# Altium PCB ESPGateway.PcbDoc
Units mil, origin at the board's own origin, x right, y up, seen from the top; angles counter-clockwise.
Board outline 1257 x 1300 mil, 2 copper layers (Top Layer, Bottom Layer); 37 components, 34 nets, 156 pads, 117 vias.
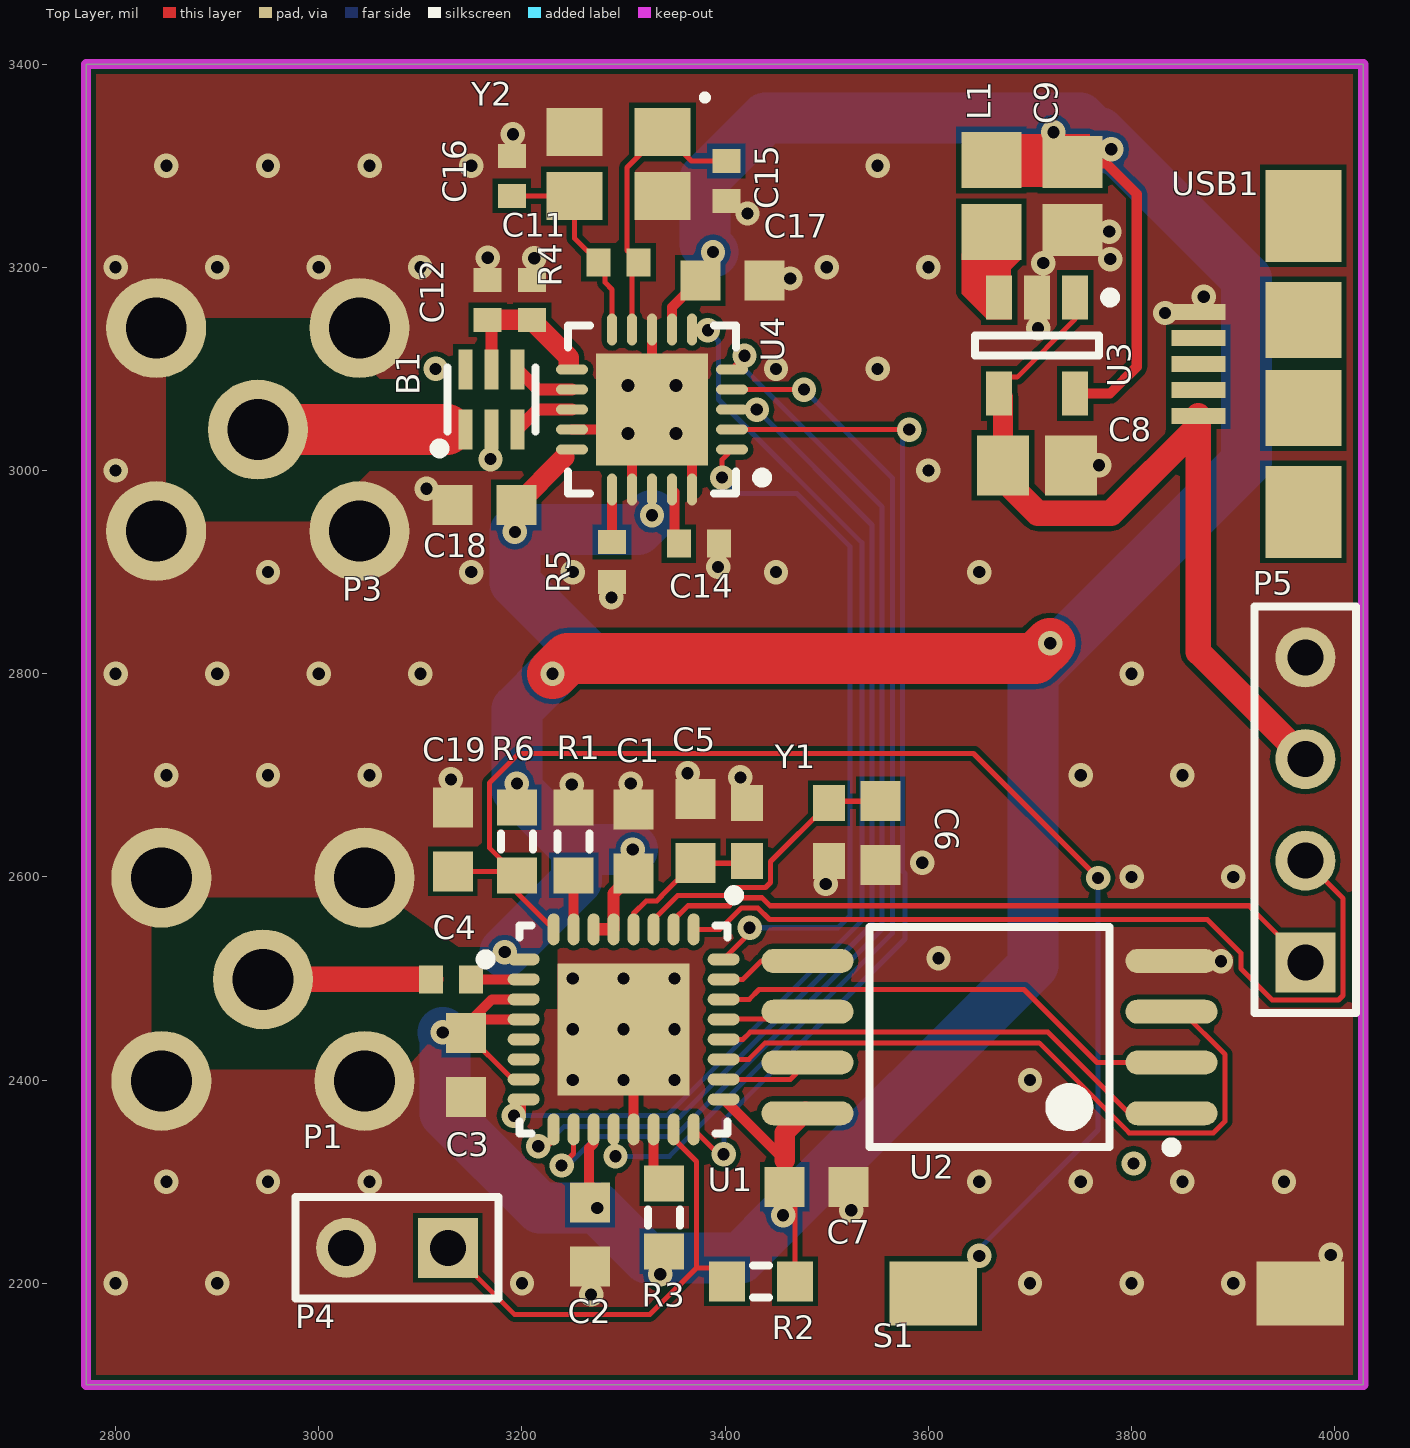
[diagram p0: Top Layer view]
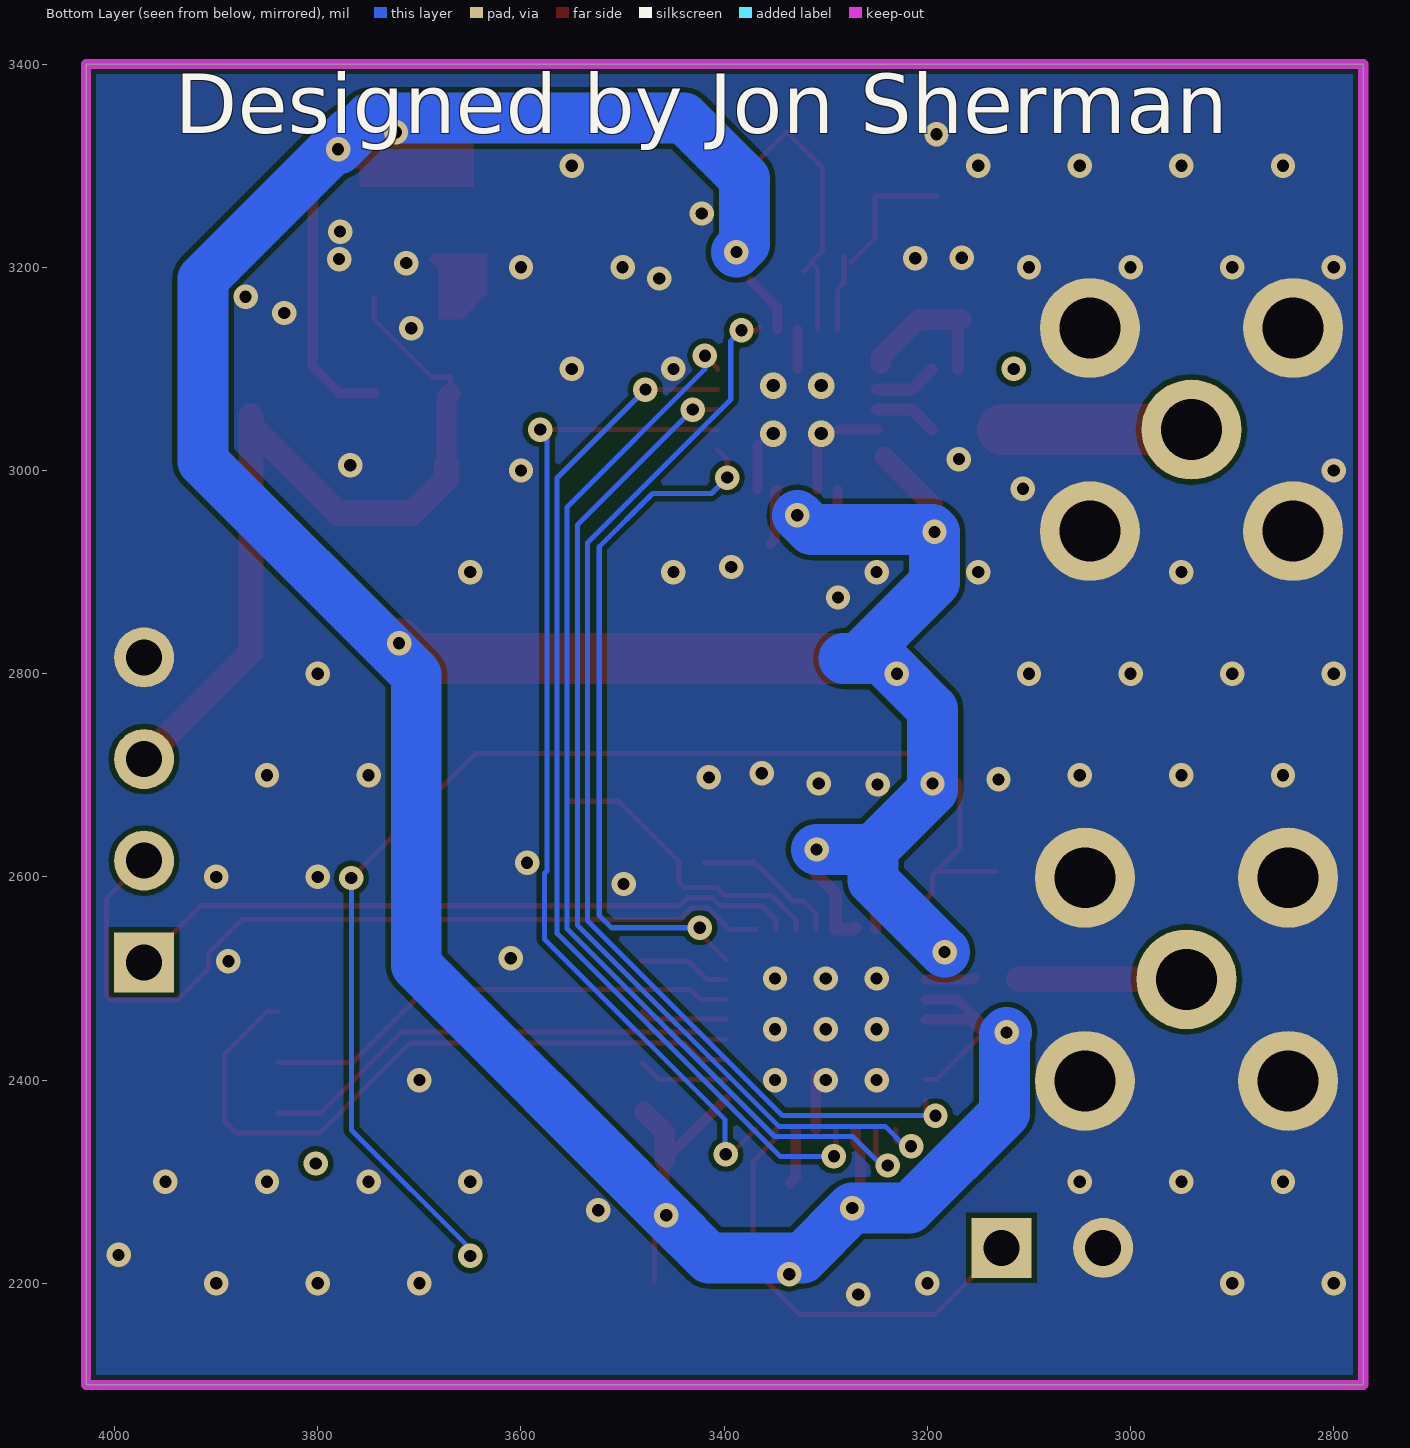
[diagram p1: Bottom Layer view, seen from below]
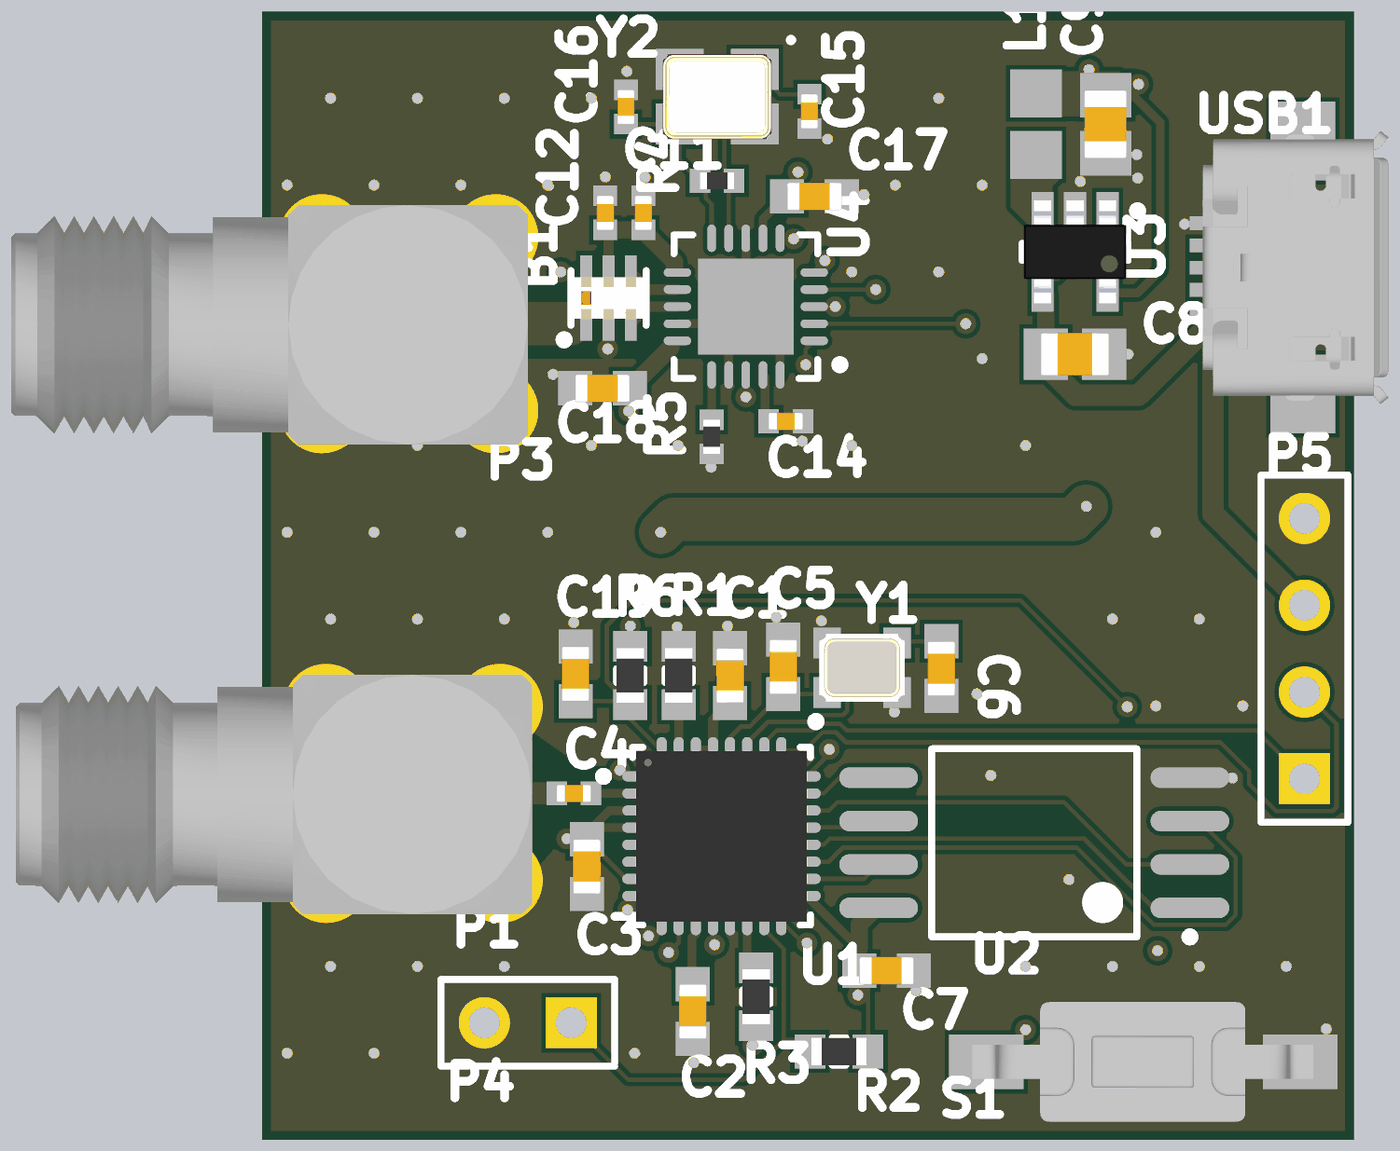
[diagram p2: 3D render of the assembled board from above, using the file's embedded part models]

## Layer stack, top to bottom
Top Solder: solder mask 0.4, Solder Resist, Dk 3.5
Top Layer: signal copper 1.4
Dielectric 1: dielectric 12.6, FR-4, Dk 4.8
Bottom Layer: signal copper 1.4
Bottom Solder: solder mask 0.4, Solder Resist, Dk 3.5

## Board outline
2771,2100 2771,3400 4028,3400 4028,2100

## Design rules (kind name [scope] priority, off if disabled: settings)
Clearance [All] p1: gap=5 ignorepadtopadclearanceinfootprint=FALSE
ComponentClearance [All] p1: gap=0 collisioncheckmode=3 verticalgap=0 showdistances=FALSE
MinimumSolderMaskSliver [All] p1: minsoldermaskwidth=0
PolygonConnect [All] p1: connectstyle=Direct reliefconductorwidth=10 reliefentries=4 polygonreliefangle="90 Angle" airgapwidth=10
RoutingVias [All] p1: holewidth=11.81 width=21.81 viastyle="Through Hole" minholewidth=11.81 minwidth=21.81 maxholewidth=248.03 maxwidth=50
SilkToSilkClearance [All] p1: silktosilkclearance=0
SilkToSolderMaskClearance [IsPad] p1: minsilkscreentomaskgap=0 clearancetoexposedcopper=TRUE
SolderMaskExpansion [All] p1: expansion=0
Width [All] p1: maxlimit=200 minlimit=5 preferedwidth=5
26 further rules are at their usual default settings.

## Components (designator, comment, footprint, x,y, rotation, side; value= is the part's Value field where it differs from the comment)
B1 "2450BM14A0002T" 2450BM15A0002E 3170,3070 r90 top
C1 "1uF" CAPC1608N 3309.84,2635 r270 top
C2 "0.1uF" CAPC1608N 3267,2248 r90 top
C3 "10uF" CAPC1608N 3145,2415 r90 top
C4 "5p6" CAPC1005N 3130,2499.21 r0 top
C5 "12pF" CAPC1608N 3371,2645 r270 top
C6 "12pF" CAPC1608N 3553,2643 r90 top
C7 "100nF" CAPC1608N 3490,2295 r180 top
C8 "10uF" CAPC2012N 3706.84,3005.13 r180 top
C9 "10uF" CAPC2012N 3742,3270.13 r90 top
C11 "4.7pF" CAPC1005N 3210,3168 r270 top
C12 "2.2nF" CAPC1005N 3166.16,3168 r270 top
C14 "33nF" CAPC1005N 3374,2928 r180 top
C15 "22pF" CAPC1005N 3401.12,3285 r90 top
C16 "22pF" CAPC1005N 3190,3290 r270 top
C17 "10nF" CAPC1608N 3407,3187 r180 top
C18 "1nF" CAPC1608N 3163,2966 r0 top
C19 "0.1uF" CAPC1608N 3132,2637 r270 top
L1 "Inductor" INDC2012N 3662,3270.13 r90 top value=4.7uH
P1 "SMB" SMA-J-P-X-RA-TH1 3095,2499.21 r90 top
P3 "SMB" SMA-J-P-X-RA-TH1 3090,3040.32 r90 top
P4 "Header 2" HDR1X2 3127,2235 r180 top
P5 "Header 4" HDR1X4 3971,2516 r90 top
R1 "12k" RESC1608N 3250.79,2635 r270 top
R2 "12k" RESC1608N 3435.26,2202 r180 top
R3 "12k" RESC1608N 3340,2265 r90 top
R4 "1M" RESC1005N 3295,3205 r0 top
R5 "22k" RESC1005N 3288.63,2910 r90 top
R6 "12k" RESC1608N 3195,2635 r270 top
S1 "SW-PB" FSMSM 3966,2190 r180 top
U1 "ESP8266EX" QFN50P500X500-32V2N 3300,2450 r0 top
U2 "Flash_SPI" SOIC127P1030-8N 3660,2442.4 r180 top
U3 "PAM2301CAAB330" SOT23-5AN 3707,3123.08 r270 top
U4 "nRF24L01P-R7" QFN50P400X400-20VN 3328,3060 r180 top
USB1 "USB Micro B Receptacle" 10104110-0001LF 3839.13,3105 r90 top
Y1 "26M" XTAL2520-4 3449,2644 r0 top
Y2 "16M" XTAL3225-4-N 3295,3302.13 r180 top

## Footprints (in the part's own frame and the unit in brackets; to place one, negate y for a bottom-side part, rotate by r counter-clockwise, add the part's x,y. Pads: shape width x height; smd on the part's side, far side on the other; paste and mask are expansions set on the pad)
2450BM15A0002E [mm] "2.45 GHz Impedance Matched Balun-BPF: For TI CC253X, CC254X, CC257X,  CC853X and CC852X Chipset family"
  rect 1x0.35 smd: 1(-0.75,0.65) 2(-0.75,0) 3(-0.75,-0.65) 4(0.75,-0.65) 5(0.75,0) 6(0.75,0.65)
  silkscreen extent -1.35,-1.1 0.8,1.42, body extent -0.62,-1 0.62,1, height 0.8
10104110-0001LF [mm]
  rect 2.3x1.9 smd: 0(-3.7,-3.3) 0(3.7,-3.3)
  rect 1.9x1.9 smd: 0(-1.1,-3.3) 0(1.1,-3.3)
  rect 0.4x1.35 smd: 1(-1.3,-0.675) 2(-0.65,-0.675) 3(0,-0.675) 4(0.65,-0.675) 5(1.3,-0.675)
  body extent -3.99,-5.8 3.99,-0.38, height 2.63
CAPC1005N [mm] "Chip Capacitor (0402), Body 1.0x0.5mm, IPC Medium Density"
  rect 0.6x0.7 smd: 1(-0.5,0) 2(0.5,0)
  body extent -0.51,-0.26 0.51,0.26, height 0.61
CAPC1608N [mm] "Chip Capacitor (0603), Body 1.6x0.8mm, IPC Medium Density"
  rect 1x1 smd: 1(-0.8,0) 2(0.8,0)
  body extent -0.8,-0.41 0.8,0.41, height 0.91
CAPC2012N [mm] "Chip Capacitor (0805), Body 2.0x1.3mm, IPC Medium Density"
  rect 1.3x1.5 smd: 1(-0.85,0) 2(0.85,0)
  body extent -1,-0.63 1,0.63, height 0.85
FSMSM [mm]
  rect 2.18x1.6 smd mask+0: 1(0,0) 2(9.175,0)
  body extent -0.38,-1.75 9.58,1.75, height 4.4
HDR1X2 [mm] "Connector; Header; 2 Position"
  rect 1.5x1.5 hole 0.9: 1(0,0)
  round 1.5 hole 0.9: 2(2.54,0)
  silkscreen extent -1.27,-1.27 3.81,1.27
HDR1X4 [mm] "Connector; Header; 4 Position"
  rect 1.5x1.5 hole 0.9: 1(0,0)
  round 1.5 hole 0.9: 2(2.54,0) 3(5.08,0) 4(7.62,0)
  silkscreen extent -1.27,-1.27 8.89,1.27
INDC2012N [mm] "Chip Inductor, Body 2.0x1.2mm, IPC Medium Density"
  rect 1.4x1.5 smd: 1(-0.9,0) 2(0.9,0)
  body extent -1.1,-0.7 1.1,0.7, height 1.1
QFN50P400X400-20VN [mm] "QFN, 20-Leads, Body 4x4mm, Pitch 0.5mm, IPC Medium Density"
  oval 0.8x0.25 smd: 1(-2,1) 2(-2,0.5) 3(-2,0) 4(-2,-0.5) 5(-2,-1) 11(2,-1) 12(2,-0.5) 13(2,0) 14(2,0.5) 15(2,1)
  oval 0.25x0.8 smd: 6(-1,-2) 7(-0.5,-2) 8(0,-2) 9(0.5,-2) 10(1,-2) 16(1,2) 17(0.5,2) 18(0,2) 19(-0.5,2) 20(-1,2)
  rect 2.8x2.8 smd: 21(0,0)
  silkscreen extent -2.88,-2.1 2.1,2.1, body extent -2.07,-2.07 2.07,2.07, height 1
QFN50P500X500-32V2N [mm] "QFN, 32-Leads, Body 5x5mm, 3.3x3.3mm Thermal Pad, Pitch 0.5mm, IPC Medium Density"
  oval 0.8x0.3 smd: 1(-2.5,1.75) 2(-2.5,1.25) 3(-2.5,0.75) 4(-2.5,0.25) 5(-2.5,-0.25) 6(-2.5,-0.75) 7(-2.5,-1.25) 8(-2.5,-1.75) 17(2.5,-1.75) 18(2.5,-1.25) 19(2.5,-0.75) 20(2.5,-0.25) 21(2.5,0.25) 22(2.5,0.75) 23(2.5,1.25) 24(2.5,1.75)
  oval 0.3x0.8 smd: 9(-1.75,-2.5) 10(-1.25,-2.5) 11(-0.75,-2.5) 12(-0.25,-2.5) 13(0.25,-2.5) 14(0.75,-2.5) 15(1.25,-2.5) 16(1.75,-2.5) 25(1.75,2.5) 26(1.25,2.5) 27(0.75,2.5) 28(0.25,2.5) 29(-0.25,2.5) 30(-0.75,2.5) 31(-1.25,2.5) 32(-1.75,2.5)
  rect 3.3x3.3 smd: 33(0,0)
  silkscreen extent -3.57,-2.6 2.6,2.6, body extent -2.51,-2.51 2.51,2.51, height 0.8
RESC1005N [mm] "Chip Resistor, Body 1.1x0.5mm, IPC Medium Density"
  rect 0.6x0.7 smd: 1(-0.5,0) 2(0.5,0)
  body extent -0.5,-0.25 0.5,0.25, height 0.35
RESC1608N [mm] "Chip Resistor, Body 1.6x0.8mm, IPC Medium Density"
  rect 0.9x1 smd: 1(-0.85,0) 2(0.85,0)
  silkscreen extent -0.2,-0.4 0.2,0.4, body extent -0.8,-0.4 0.8,0.4, height 0.55
SMA-J-P-X-RA-TH1 [mm] "SMA right angle"
  round 2.5 hole 1.524: 1(0,3.81) 2(-2.54,6.35) 2(-2.54,1.27) 2(2.54,6.35) 2(2.54,1.27)
  body extent -3.53,0.33 3.47,15.43, height 9.63
SOIC127P1030-8N [mm] "SOIC, 8-Leads, Body 5.3x7.5mm, Pitch 1.27mm, IPC Medium Density"
  oval 2.3x0.6 smd: 1(-4.55,1.905) 2(-4.55,0.635) 3(-4.55,-0.635) 4(-4.55,-1.905) 5(4.55,-1.905) 6(4.55,-0.635) 7(4.55,0.635) 8(4.55,1.905)
  silkscreen extent -4.67,-2.75 3,2.88, body extent -3.75,-2.73 3.75,2.73, height 2.65
SOT23-5AN [mm] "SOT23, 5-Leads, Body 2.9x1.6mm, Pitch 0.95mm, Lead Span 2.8mm, IPC Medium Density"
  rect 1.1x0.65 smd: 1(-1.2,0.95) 2(-1.2,0) 3(-1.2,-0.95) 4(1.2,-0.95) 5(1.2,0.95)
  silkscreen extent -1.32,-1.55 0.25,1.95, body extent -1.5,-1.5 1.5,1.5, height 1.3
XTAL2520-4 [mm]
  rect 0.8x0.9 smd: 1(-0.7,-0.725) 2(1.35,-0.725) 3(1.35,0.725) 4(-0.7,0.725)
  silkscreen extent -1.15,-1.7 -0.9,-1.45, body extent -0.92,-1 1.58,1, height 0.8
XTAL3225-4-N [mm]
  rect 1.4x1.2 smd: 1(-1.101,-0.791) 2(1.099,-0.791) 3(1.099,0.809) 4(-1.101,0.809)
  silkscreen extent -2.21,-1.7 -2.11,-1.6, body extent -1.61,-1.25 1.61,1.27, height 0.6

## Part data
B1: "JOHANSON TECHNOLOGY         2450BM14A0002T             Baluns Transformer, SMD, 2.4 GHz, 2.5 GHz, 2 dB, 0603", Case/Package=0603, Case Code (Metric)=1608, Frequency=2.45GHz, Manufacturer=Johanson, Max Frequency=2.5GHz, Max Operating Temperature=85°C, Min Operating Temperature=-40°C, Package Quantity=4000, Supplier Part Number 1=712-1574-1-ND, Case Code (Imperial)=0603, ComponentLink1Description=http://www.farnell.com/datasheets/1643106.pdf, ComponentLink1URL=http://www.farnell.com/datasheets/1643106.pdf, ComponentLink2Description=https://www.johansontechnology.com/datasheets/baluns/Balun_Filter_Matched_2450BM14A0002_v2.pdf, ComponentLink2URL=https://www.johansontechnology.com/datasheets/baluns/Balun_Filter_Matched_2450BM14A0002_v2.pdf, ComponentLink3Description=http://www.mouser.com/ds/2/611/2450BM14A0002T-247800.pdf, ComponentLink3URL=http://www.mouser.com/ds/2/611/2450BM14A0002T-247800.pdf, Contact Plating=Matte,Tin, Impedance=50R, Insertion Loss=2dB, Manufacturer Part Number=2450BM14A0002T, Mount="Surface Mount", Number of Pins=6, Packaging="Tape and Reel", Pricing 1="1=0.94, 10=0.83, 25=0.7496, 100=0.656, 250=0.57568, 500=0.50872, 1000=0.40163 (USD)", REACH SVHC=Unknown, Return Loss=9.5dB, Stock 1=209106, Supplier 1=Digi-Key, Termination=SMD/SMT
C1: library part "Cap Semi", "Capacitor (Semiconductor SIM Model)", Supplier Part Number 1=1276-6524-1-ND, LatestRevisionDate=29-May-2009, LatestRevisionNote="IPC-7351 Footprint Added.", PackageDescription="Chip Capacitor", PackageReference=C1206, Published=8-Jun-2000, Publisher="Altium Limited", Supplier 1=Digi-Key
C2 C3 C14: library part "Cap Semi", "Capacitor (Semiconductor SIM Model)", LatestRevisionDate=29-May-2009, LatestRevisionNote="IPC-7351 Footprint Added.", PackageDescription="Chip Capacitor", PackageReference=C1206, Published=8-Jun-2000, Publisher="Altium Limited"
  C2: Supplier 1=Digi-Key, Supplier 2=Digi-Key, Supplier Part Number 2=1276-1012-1-ND
  C14: Supplier 1=Digi-Key, Supplier 2=Digi-Key, Supplier Part Number 2=1276-1177-1-ND
C4: library part "Cap Semi", "Capacitor (Semiconductor SIM Model)", Supplier Part Number 1=490-6250-1-ND, LatestRevisionDate=29-May-2009, LatestRevisionNote="IPC-7351 Footprint Added.", PackageDescription="Chip Capacitor", PackageReference=C1206, Published=8-Jun-2000, Publisher="Altium Limited", Supplier 1=Digi-Key
C5 C6 C19: library part "Cap Semi", "Capacitor (Semiconductor SIM Model)", Supplier Part Number 1=1276-1254-1-ND, LatestRevisionDate=29-May-2009, LatestRevisionNote="IPC-7351 Footprint Added.", PackageDescription="Chip Capacitor", PackageReference=C1206, Published=8-Jun-2000, Publisher="Altium Limited", Supplier 1=Digi-Key
C7: library part "Cap Semi", "Capacitor (Semiconductor SIM Model)", Supplier Part Number 1=1276-1012-1-ND, LatestRevisionDate=29-May-2009, LatestRevisionNote="IPC-7351 Footprint Added.", PackageDescription="Chip Capacitor", PackageReference=C1206, Published=8-Jun-2000, Publisher="Altium Limited", Supplier 1=Digi-Key
C8 C9: library part "Cap Semi", "Capacitor (Semiconductor SIM Model)", Supplier Part Number 1=1276-6456-1-ND, LatestRevisionDate=29-May-2009, LatestRevisionNote="IPC-7351 Footprint Added.", PackageDescription="Chip Capacitor", PackageReference=C1206, Published=8-Jun-2000, Publisher="Altium Limited", Supplier 1=Digi-Key
C11: library part "Cap Semi", "Capacitor (Semiconductor SIM Model)", Supplier Part Number 1=311-1367-1-ND, LatestRevisionDate=29-May-2009, LatestRevisionNote="IPC-7351 Footprint Added.", PackageDescription="Chip Capacitor", PackageReference=C1206, Published=8-Jun-2000, Publisher="Altium Limited", Supplier 1=Digi-Key
C12: library part "Cap Semi", "Capacitor (Semiconductor SIM Model)", Supplier Part Number 1=490-4914-1-ND, LatestRevisionDate=29-May-2009, LatestRevisionNote="IPC-7351 Footprint Added.", PackageDescription="Chip Capacitor", PackageReference=C1206, Published=8-Jun-2000, Publisher="Altium Limited", Supplier 1=Digi-Key
C15 C16: library part "Cap Semi", "Capacitor (Semiconductor SIM Model)", Supplier Part Number 1=399-7775-1-ND, LatestRevisionDate=29-May-2009, LatestRevisionNote="IPC-7351 Footprint Added.", PackageDescription="Chip Capacitor", PackageReference=C1206, Published=8-Jun-2000, Publisher="Altium Limited", Supplier 1=Digi-Key
C17: library part "Cap Semi", "Capacitor (Semiconductor SIM Model)", Supplier Part Number 1=1276-1921-1-ND, LatestRevisionDate=29-May-2009, LatestRevisionNote="IPC-7351 Footprint Added.", PackageDescription="Chip Capacitor", PackageReference=C1206, Published=8-Jun-2000, Publisher="Altium Limited", Supplier 1=Digi-Key
C18: library part "Cap Semi", "Capacitor (Semiconductor SIM Model)", Supplier Part Number 1=311-1080-1-ND, LatestRevisionDate=29-May-2009, LatestRevisionNote="IPC-7351 Footprint Added.", PackageDescription="Chip Capacitor", PackageReference=C1206, Published=8-Jun-2000, Publisher="Altium Limited", Supplier 1=Digi-Key
L1: Supplier Part Number 1=445-8659-1-ND, Code_IEC=1005, Code_JEITA=0402, LatestRevisionDate=29-May-2009, LatestRevisionNote="IPC-7351 Footprint Added.", PackageDescription="Chip Inductor", PackageReference=0402-A, Published=8-Jun-2000, Publisher="Altium Limited", Supplier 1=Digi-Key
P1 P3: "SMB Straight Connector", Supplier Part Number 1=931-1361-ND, LatestRevisionDate=17-Jul-2002, LatestRevisionNote="Re-released for DXP Platform.", Publisher="Altium Limited", Supplier 1=Digi-Key
P4: "Header, 2-Pin", LatestRevisionDate=17-Jul-2002, LatestRevisionNote="Re-released for DXP Platform.", Publisher="Altium Limited"
P5: "Header, 4-Pin", LatestRevisionDate=17-Jul-2002, LatestRevisionNote="Re-released for DXP Platform.", Publisher="Altium Limited"
R1 R2 R3 R4 R5 R6: library part "Res Semi", "Semiconductor Resistor", LatestRevisionDate=17-Jul-2002, LatestRevisionNote="Re-released for DXP Platform.", PackageDescription="Axial Device, Thru-Hole; 2 Leads; 0.5 in Pin Spacing", PackageReference=AXIAL-0.5, Published=8-Jun-2000, Publisher="Altium Limited", Supplier 1=Digi-Key, Supplier 2=Digi-Key
  R1 R2 R3: Supplier Part Number 2=RMCF0603FT12K0CT-ND
  R4: Supplier Part Number 2=A121559CT-ND
  R5: Supplier Part Number 2=541-22KGCT-ND
  R6: Supplier 3=Digi-Key, Supplier Part Number 3=RMCF0603FT12K0CT-ND
S1: "Switch", Supplier Part Number 1=450-1140-ND, LatestRevisionDate=17-Jul-2002, LatestRevisionNote="Re-released for DXP Platform.", PackageDescription="Switch; 2 Leads", PackageReference=SPST-2, Published=24-Mar-1999, Publisher="Altium Limited", Supplier 1=Digi-Key
U2: Supplier Part Number 1=W25Q16JVSSIQ-ND, Supplier 1=Digi-Key
U3: "IC REG BCK SYNC 3.3V 0.8A TSOT25", Case/Package=SOT-23-5, Manufacturer=Diodes, Max Input Voltage=5.5V, Max Operating Temperature=85°C, Max Output Current=800mA, Min Input Voltage=2.5V, Min Operating Temperature=-40°C, Min Output Voltage=3.3V, Package Quantity=3000, Supplier Part Number 1=PAM2301CAAB330DICT-ND, Switching Frequency=1.5MHz, Efficiency=96%, Manufacturer Part Number=PAM2301CAAB330, Mount="Surface Mount", Number of Outputs=1, Number of Pins=5, Operating Supply Voltage=5.5V, Output Configuration=Positive, Output Current=800mA, Output Type=Fixed, Output Voltage=3.3V, Packaging="Tape and Reel", Pricing 1="1=0.6, 10=0.51, 100=0.3807, 500=0.29912, 1000=0.23113 (USD)", Radiation Hardening=No, Stock 1=2099, Supplier 1=Digi-Key, Synchronous Rectifier=Yes
U4: "RF Transceiver SNGL-CHP ULTR-LW POW 2.4GHz TRNSCVR", Case/Package=QFN, Current - Receiving=13.5mA, Current - Transmitting=11.3mA, Frequency=2.4GHz, Manufacturer="Nordic Semiconductor", Max Operating Temperature=85°C, Max Supply Voltage=3.6V, Min Operating Temperature=-40°C, Package Quantity=1500, Supplier Part Number 1=1490-1033-1-ND, Data Rate=2Mbps, Depth=4mm, Interface=SPI, Length=4mm, Manufacturer Part Number=nRF24L01P-R7, Packaging="Tape and Reel", Pricing 1="1=3.53, 10=3.15, 25=2.8352, 100=2.583, 250=2.331, 500=2.0916 (USD)", Sensitivity=-94dBm, Stock 1=26627, Supplier 1=Digi-Key
USB1: Supplier Part Number 1=609-4052-1-ND, Supplier 1=Digi-Key
Y1: library part XTAL_4SMD, "Crystal Oscillator (4 pin)", Supplier Part Number 1=SER4105CT-ND, LatestRevisionDate=17-Jul-2002, LatestRevisionNote="Re-released for DXP Platform.", PackageDescription="Crystal, Thru-Hole; 2 Leads; Body 3.1 x 8.2 mm (Dia.xH)", PackageReference=R38, Published=8-Jun-2000, Publisher="Altium Limited", Supplier 1=Digi-Key
Y2: library part XTAL_4SMD, "Crystal Oscillator (4 pin)", Supplier Part Number 1=SER4069CT-ND, LatestRevisionDate=17-Jul-2002, LatestRevisionNote="Re-released for DXP Platform.", PackageDescription="Crystal, Thru-Hole; 2 Leads; Body 3.1 x 8.2 mm (Dia.xH)", PackageReference=R38, Published=8-Jun-2000, Publisher="Altium Limited", Supplier 1=Digi-Key

## Via types
v1: diameter 24, hole 12, Top Layer to Bottom Layer, tented both sides, 113 vias
v2: diameter 25.98, hole 12.99, Top Layer to Bottom Layer, tented top, 4 vias

## Nets (pads, with @x,y where several pads share a name; then routed paths per layer and width w, separated by ;. In a path a pad name is that pad's centre, name@x,y a point inside that pad or via, vN(x,y) a via of type N, cw(c..) or ccw(c..) an arc to the next point about the centre after c; other vN are vias at no path point)
3V3: C1.2 C2.2 C3.2 C7.2 C9.2 C17.2 C18.2 L1.2 R2.1 R3.1 R6.1 U1.1 U1.3 U1.4 U1.7 U1.11 U1.17 U1.29 U1.30 U2.8 U3.5 U4.7 U4.15 U4.18 | length 4687.6
  Top Layer w5: C3.2 3190.71,2400.79 U1.7 ; C3.2@3154.57,2456.06 3158.35,2459.84 3159.5,2461 3200.42,2461 U1.4 ; C7.2 3468.73,2284.78 R2.1
  Top Layer w10: C3.2 3154.57,2456.06 3147.06,2456.06 3170.53,2479.53 U1.3 ; C3.2@3158.35,2459.84 U1.4 ; C2.2@3270.47,2293 3266,2297.47 3266,2333.11 3270.47,2337.59 U1.11 ; U4.7 3347.68,3160.68 C17.2@3373,3186 ; U1.17 3458.5,2321.02 3459,2320.53 C7.2@3459,2295 ; C9.2@3737,3302.13 3775,3302.13 3805,3272.13 3805,3102.13 3778.7,3075.83 U3.5
  Top Layer w12: U1.30@3271,2550 3272.57,2548.43 U1.29 3290.16,2583.82 C1.2
  Top Layer w20: C18.2 3194.63,2966 3241.81,3013.18 ; 3458.5,2321.02 3458.5,2348.5 U2.8@3479,2369
  Top Layer w50: v1(3230,2800) 3245,2815 3705,2815 v1(3720,2830)
  Bottom Layer w50: v1(3122,2447) 3124.21,2444.79 3124.21,2367.39 3217.6,2274 v1(3274,2274) 3322.99,2225.01 3415.01,2225.01 v1(3457,2267) 3703,2513 3703,2799 3913,3009 3913,3188.4 3768.4,3333 ; v1(3183,2526) 3253.6,2596.6 3253.6,2627 ; 3282,2815 3268,2815 ; v1(3309,2627) 3253.6,2627 ; v1(3328,2956) 3314,2942 3195.44,2942 v1(3193,2939.56) 3193,2890 3268,2815 ; v1(3388,3215) 3380,3223 3380,3287.4 3439.6,3347 3749.13,3347 v1(3780,3316.13) ; 3253.6,2627 3195,2685.6 v1(3195,2692) 3195,2765 v1(3230,2800) 3250,2820 3255,2815 3268,2815
  other v1: 3336,2209 3723,3333
5V: C8.2 P5.3 U3.1 U3.4 USB1.1 | length 844.5
  Top Layer w5: U3.4 3669.6,3091.92 3687.36,3091.92 3744.4,3148.96 U3.1
  Top Layer w20: U3.4 3673.38,3072.05 C8.2
  Top Layer w25: C8.2 3673.38,2992.2 3707.47,2958.11 3780,2958.11 3865.71,3043.81 ; USB1.1 3865.71,3043.81 ; P5.3 3865.71,2821.29 3865.71,3043.81
ANT: C4.1 P1.1 | length 165.3
  Top Layer w25: P1.1 C4.1
ANT1: B1.4 U4.12 | length 61.9
  Top Layer w12: B1.4 3215.43,3079.68 U4.12
ANT2: B1.3 U4.13 | length 61.8
  Top Layer w12: B1.3 3215.12,3060 U4.13
CE: U1.24 U4.1 | length 694.5
  Top Layer w5: v1(3397,2993) 3397,3010.89 U4.1 ; U1.24 3424,2544.47 v1(3424,2550)
  Bottom Layer w5: v1(3397,2993) 3412.5,2977.5 3470.5,2977.5 3523,2925 3523,2562 3511,2550 v1(3424,2550)
CS: U1.16 U4.2 | length 1005.1
  Top Layer w5: U1.16 3393.47,2327 v1(3398.43,2327) ; U4.2 v1(3581.06,3040.32)
  Bottom Layer w5: v1(3398.43,2327) 3399,2327.57 3399,2361 3577,2539 3577,2603.42 3574.5,2605.92 3574.5,3033.75 v1(3581.06,3040.32)
EXT_RSTB: C19.2 R6.2 S1.2 U1.32 | length 1313.9
  Top Layer w5: C19.2 R6.2@3191.03,2605.5 ; U1.32 3195,2584.53 R6.2 R6.2@3191.03,2605.5 ; v1(3767,2599) 3644.5,2721.5 3196.92,2721.5 3167.81,2692.39 3167.81,2628.72 R6.2@3191.03,2605.5
  Bottom Layer w5: v1(3650,2227) 3650,2231 3649,2232 3648,2232 3767,2351 v1(3767,2599)
GND: B1.2 C1.1 C2.1 C3.1 C5.1 C6.1 C7.1 C8.1 C9.1 C11.1 C12.1 C14.1 C15.1 C16.1 C17.1 C18.1 C19.1 P1.2 P3.2 P4.2 P5.4 R1.1 R5.1 S1.1 U1.13 U1.33 U2.4 U3.2 U4.8 U4.14 U4.17 U4.20 U4.21 USB1.5 Y1.2 Y1.4 Y2.2 Y2.4 | length 215.5
  Top Layer w10: U4.14 U4.21@3287.32,3040.32 ; U4.17 U4.21@3308.32,3020.68 ; U1.13 3309.84,2404.84 U1.33@3311,2406 ; U4.21@3328,3100 U4.8 ; U4.20 U4.21@3367.37,3025.63
  other v1: 3268,2189 2800,2200 2900,2200 3200,2200 3700,2200 3800,2200 3900,2200 3996,2228 3524,2272 2850,2300 2950,2300 3050,2300 3650,2300 3750,2300 3850,2300 3950,2300 3250,2400 3300,2400 3350,2400 3700,2400 3250,2450 3300,2450 3350,2450 3250,2500 3300,2500 3350,2500 3888,2517 3610,2520 3499,2593 3800,2600 3900,2600 3594,2614 3249,2691 3307,2692 3130,2696 3415,2698 2850,2700 2950,2700 3050,2700 3750,2700 3850,2700 3363,2702 2800,2800 2900,2800 3000,2800 3100,2800 3800,2800 3288,2875 2950,2900 3150,2900 3250,2900 3450,2900 3650,2900 3393,2905 3106,2982 2800,3000 3600,3000 3768,3005.13 3169,3011.28 3450,3100 3550,3100 3708,3140.13 3833,3155 3871,3171 3464,3189 2800,3200 2900,3200 3000,3200 3100,3200 3500,3200 3600,3200 3713,3204.13 3779,3208.13 3212,3209 3166.23,3209.51 3778,3235.13 3422,3253 2850,3300 2950,3300 3050,3300 3150,3300 3550,3300 3191.03,3331
  other v2: 3304.38,3036.38 3351.62,3036.38 3304.38,3083.62 3351.62,3083.62
GPIO0: P4.1 R2.2 U1.15 | length 472
  Top Layer w5: P4.1 3192.5,2169.5 3325.97,2169.5 3371.67,2215.2 ; U1.15 3349.21,2342.46 3371.67,2320 3371.67,2215.2 ; R2.2 3388.6,2215.2 3371.67,2215.2
IRQ: U1.8 U4.6 | length 1111.6
  Top Layer w5: v1(3192,2365) 3201.57,2365 U1.8 ; U4.6@3365,3141 3369,3137 3370,3138 v1(3383,3138)
  Bottom Layer w5: v1(3192,2365) 3342.58,2365 3534.5,2556.92 3534.5,2928.92 3393.5,3069.92 3393.5,3127.5 v1(3383,3138)
LNA: C4.2 U1.2 | length 48.3
  Top Layer w10: C4.2@3154,2501 3155.79,2499.21 U1.2
MISO: U1.10 U4.5 | length 1092.1
  Top Layer w5: v1(3239,2316) 3250.79,2327.79 U1.10 ; U4.5 3406.06,3100.06 v1(3419,3113)
  Bottom Layer w5: v1(3239,2316) 3245,2316 3273.5,2344.5 3350.36,2344.5 3554.5,2548.64 3554.5,2964.08 3419,3099.58 v1(3419,3113)
MOSI: U1.12 U4.4 | length 1032.8
  Top Layer w5: U1.12 3290.16,2326.84 v1(3292,2325) ; U4.4 v1(3477.52,3079.68)
  Bottom Layer w5: v1(3292,2325) 3345,2325 3564.5,2544.5 3564.5,2992.7 v1(3477.52,3079.68)
NetB1_1: B1.1 P3.1 | length 186.1
  Top Layer w50: P3.1 2940.16,3040.47 3126,3040.47
NetC14_2: C14.2 U4.19 | length 56
  Top Layer w10: U4.19 3350,2978.94 3350,2932.31 C14.2
NetC15_2: C15.2 R4.2 U4.9 Y2.1 | length 301.6
  Top Layer w5: U4.9 3308.32,3198.63 R4.2@3313.68,3203.99 ; R4.2@3321.19,3196.48 R4.2@3313.68,3203.99 ; C15.2 3366.94,3304.69 Y2.1 3303.3,3298.21 3303.3,3216.39 R4.2 R4.2@3313.68,3203.99
NetC16_2: C16.2 R4.1 U4.10 Y2.3 | length 211.9
  Top Layer w5: C16.2 Y2.3 Y2.3 3251.74,3228.57 R4.1 ; R4.1@3281.82,3211.02 3281.82,3185 3288.63,3178.19 U4.10
NetL1_1: L1.1 U3.3
NetR1_2: R1.2 U1.31 | length 53.1
  Top Layer w10: U1.31 R1.2
NetR3_2: R3.2 U1.14 | length 55.4
  Top Layer w10: U1.14 3329.53,2303.94 R3.2@3335,2298.46
NetR5_2: R5.2 U4.16 | length 51.6
  Top Layer w10: R5.2 U4.16
RXD: P5.1 U1.26 | length 666.3
  Top Layer w5: U1.26 3349.21,2557.57 3363.31,2571.67 3403.95,2571.67 3411.78,2579.5 3436.22,2579.5 3444.05,2571.67 3915.33,2571.67 P5.1
SCLK: U1.9 U4.3 | length 1025.3
  Top Layer w5: v1(3216,2335) 3225,2335 3231.1,2341.1 U1.9 ; U4.3 v1(3431,3060)
  Bottom Layer w5: v1(3216,2335) 3222,2335 3241.5,2354.5 3346.22,2354.5 3544.5,2552.78 3544.5,2946.5 v1(3431,3060)
SD_CLK: U1.21 U2.6 | length 85.6
  Top Layer w5: U1.21 3398.8,2460.21 3473.68,2460.21 U2.6
SD_CMD: U1.20 U2.1 | length 477
  Top Layer w5: U1.20 3417.59,2440.16 3424.65,2447.21 3717.64,2447.21 3796.86,2367.99 3796.86,2367.4 U2.1
SD_D0: U1.22 U2.2 | length 474.5
  Top Layer w5: U1.22 3423.69,2479.53 3433.38,2489.21 3694.02,2489.21 3765.83,2417.4 U2.2
SD_D1: U1.23 U2.5 | length 90
  Top Layer w5: U1.23 3417.47,2499.21 3435.66,2517.4 U2.5
SD_D2: U1.18 U2.7 | length 89.3
  Top Layer w5: U1.18 3464.25,2400.79 U2.7
SD_D3: U1.19 U2.3 | length 677.8
  Top Layer w5: U1.19 3423.16,2420.47 3439.4,2436.71 3709.05,2436.71 3797.67,2348.09 3880.6,2348.09 3891.91,2359.4 3891.91,2425.4 3849.91,2467.4 U2.3
TXD: P5.2 U1.25 | length 844.1
  Top Layer w5: U1.25 3394.85,2548.43 3415.92,2569.5 3432.08,2569.5 3443.5,2558.08 3874.5,2558.08 3907.5,2525.08 3907.5,2509.84 3938.37,2478.97 4003.63,2478.97 4008.03,2483.37 4008.03,2578.97 P5.2
VDD_PA: B1.5 C11.2 C12.2 U4.11 | length 151.9
  Top Layer w12: C12.2 3170,3144.47 B1.5
  Top Layer w20: C12.2 3209,3148.31 3210,3147.31 3246,3111.31 3246,3105
XTAL_IN: C5.2 U1.28 Y1.1 | length 147.1
  Top Layer w5: U1.28 3309.84,2563.98 3322.18,2576.32 3332.63,2576.32 3337.03,2580.71 3337.03,2581.23 C5.2@3371.26,2615.46 ; C5.2 Y1.1@3419.49,2613.5
XTAL_OUT: C6.2 U1.27 Y1.3 | length 290.5
  Top Layer w5: U1.27 3329.53,2557.89 3353.31,2581.67 3399.81,2581.67 3407.64,2589.5 3439.56,2589.5 3444.69,2594.63 3444.69,2615.08 Y1.3 ; Y1.3@3504.1,2674.5 C6.2
pads on no net: B1.6 U1.5 U1.6 USB1.0 USB1.2 USB1.3 USB1.4
copper on no net:
  other v1: 3802,2318 3115,3100

## Polygon pours and split planes (outlines as drawn)
GND on Bottom Layer "GND" (solid, remove dead copper, pour order 2): 2661,3527 4248,3527 4182,3461 4182,2043 2585,2043
GND on Top Layer "GND" (solid, remove dead copper, pour order 0): 2771,3400 4028,3400 4028,2100 2771,2100

## Keep-outs
Keep-Out Layer:
  the board outline again, w10

## Other copper
Top Layer:
  region net 3V3: 3759,3331.13 3646,3331.13 3646,3279.13 3759,3279.13
  pour cut-out: 2835,2580 3068.47,2580 3137.18,2531.21 3235,2530 3235,2469.89 3136.65,2469.34 3085,2410 2835,2410
  pour cut-out: 2850,2950 3000,2950 3050,3000 3410,3000 3410,3090 3060,3090 3000,3150 2850,3150
  pour cut-out: 3279.8,3103.24
  pour cut-out: 3279.8,3103.24
  region net NetL1_1: 3681,3148.96 3681,3198.13 3691,3208.13 3686,3213.13 3633,3213.13 3633,3173.78 3657.82,3148.96

## Silkscreen, mask and mechanical layers (free items; w line width, h text height)
Bottom Overlay:
  text "Designed by Jon Sherman" at 3941,3313 h100